# Altium PCB PCB_75_50.PcbDoc
Units mil, origin at the board's own origin, x right, y up, seen from the top; angles counter-clockwise.
Board outline 2583.93 x 856.85 mil, 2 copper layers (Top Layer, Bottom Layer), stack 33.8 mil thick; 13 components, 18 nets, 33 pads, 0 vias.
Unrouted connection lines stored in the file: 23.
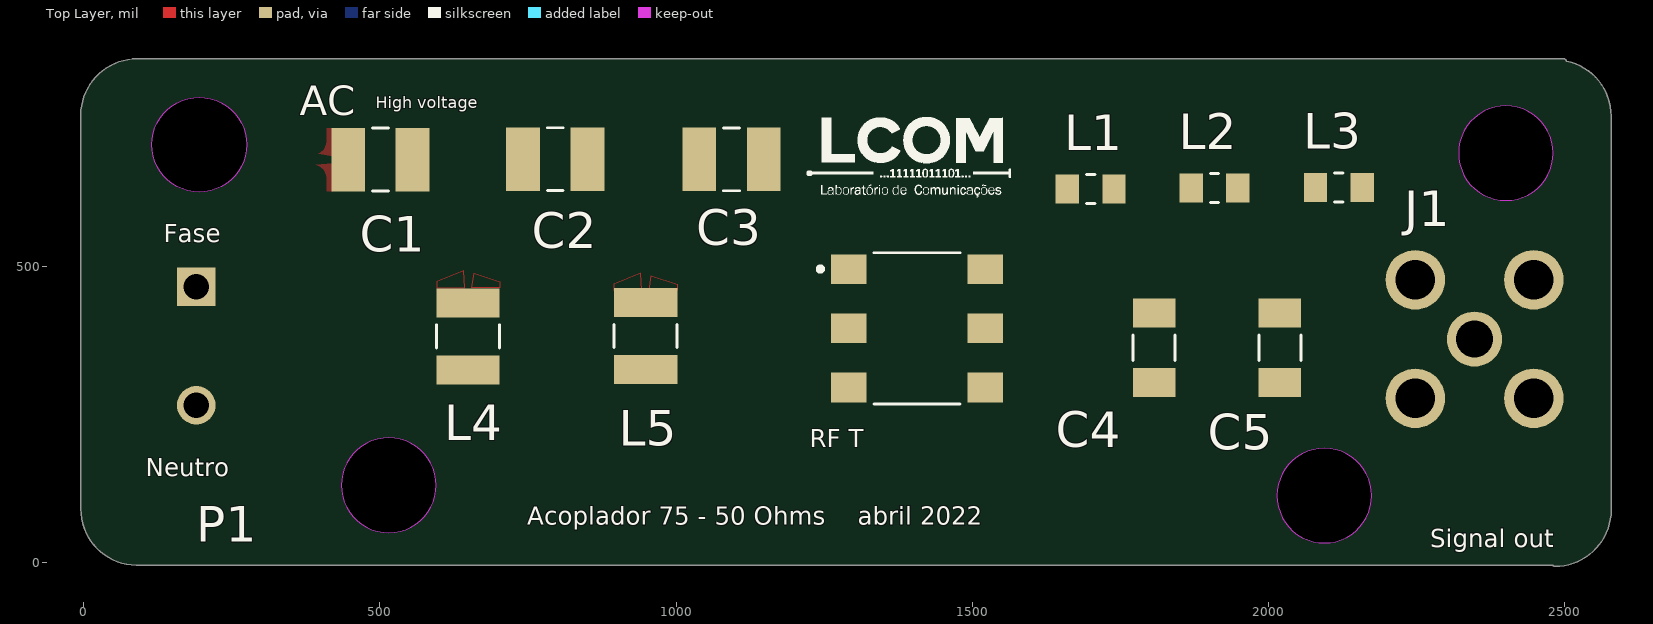
[diagram p0: Top Layer view]
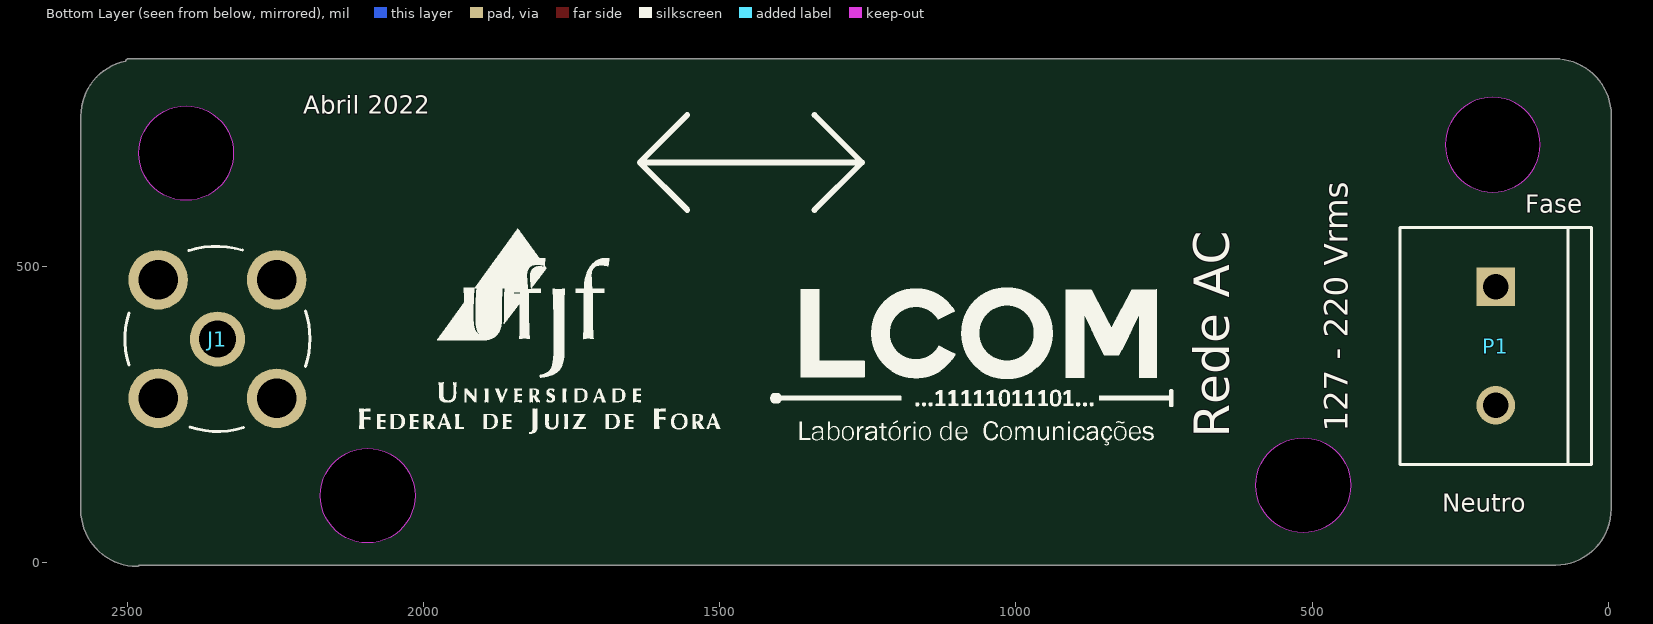
[diagram p1: Bottom Layer view, seen from below]

## Layer stack, top to bottom
Top Solder: solder mask 0.4, Solder Resist, Dk 3.5
Top Layer: signal copper 1.4
Dielectric 1: dielectric 31, FR-4, Dk 4.8
Bottom Layer: signal copper 1.4
Bottom Solder: solder mask 0.4, Solder Resist, Dk 3.5

## Board outline
-5.01,90 ccw(c90,90) 88.58,-5 ccw(c89.3,-0.05) 89.3,-5.06 2480.07,-5.06 ccw(c2483.9,-1.82) 2483.9,-6.83 ccw(c2483.9,88.18) 2578.91,88.18 2578.91,753.18 ccw(c2483.9,753.18) 2503.34,846.19 ccw(c2498.46,845.01) 2498.46,850.02 90.61,850.02 ccw(c90.61,845.01) 90.25,850.01 ccw(c90,844.93) 90,850.02 ccw(c90,755) -5.01,755
cut-out: 195,625 cw(c195,705) 115,705 cw(c195,705) 195,785 cw(c195,705) 275,705 cw(c195,705)
cut-out: 435,130 ccw(c515,130) 515,50 ccw(c515,130) 595,130 ccw(c515,130) 515,210 ccw(c515,130)
cut-out: 2014.6,112.59 ccw(c2094.6,112.59) 2094.6,32.59 ccw(c2094.6,112.59) 2174.6,112.59 ccw(c2094.6,112.59) 2094.6,192.59 ccw(c2094.6,112.59)
cut-out: 2321.2,690.83 ccw(c2401.2,690.83) 2401.2,610.83 ccw(c2401.2,690.83) 2481.2,690.83 ccw(c2401.2,690.83) 2401.2,770.83 ccw(c2401.2,690.83)

## Design rules (kind name [scope] priority, off if disabled: settings)
Clearance [All] p1: gap=10 ignorepadtopadclearanceinfootprint=FALSE except(0: Arc-Hole Track-Hole SMDPad-Hole THPad-Hole Via-Hole Fill-Hole Poly-Hole Region-Hole Text-Hole)
PolygonConnect [All] p1: connectstyle=Relief reliefconductorwidth=10 reliefentries=4 polygonreliefangle="90 Angle" airgapwidth=10
RoutingVias [All] p1: holewidth=28 width=50 viastyle="Through Hole" minholewidth=28 minwidth=50 maxholewidth=28 maxwidth=50
SolderMaskExpansion [All] p1: expansion=4 istentingtop=FALSE
Width imp_75 [InNetClass('imp_75')] p1: maxlimit=28 minlimit=23 preferedwidth=25.3 impedanceprofiledriven=TRUE impedanceprofileid={7B7016B5-FD99-4E57-9771-6602E8CCD9C1} impedanceprofilevalue=75.000000 minimp=50.000000 maximp=50.000000 favimp=50.000000
Width imp_50 [All] p2: maxlimit=56 minlimit=50 preferedwidth=53.66 impedanceprofiledriven=TRUE impedanceprofileid={B631ACBE-834E-4386-80CB-AED6A723D8CF} impedanceprofilevalue=50.000000 minimp=50.000000 maximp=50.000000 favimp=50.000000
30 further rules are at their usual default settings.

## Classes and differential pairs
net class imp_75: GND_quente NetC1_1 NetC1_2 NetC2_2 NetC3_2

## Components (designator, comment, footprint, x,y, rotation, side; value= is the part's Value field where it differs from the comment)
C1 "cap_1210 1.3nF" CAPC3225X200N 500.88,679.66 r0 top
C2 "cap_1210 620 pF" CAPC3225X200N 796.01,680.43 r0 top
C3 "cap_1210 1.3nF" CAPC3225X200N 1093.68,680.41 r0 top
C4 "cap1206 82pF" CAPC3216X160N 1807.24,362.2 r270 top
C5 "cap1206 82pF" CAPC3216X160N 2019.36,362.19 r270 top
J1 "SMA" JOHNSON_142-0701-201 2348.18,376.82 r180 bottom
L1 "ind_0805 180nH" IND_ASMCI-0805-4R7M-T 1700.04,630.27 r0 top
L2 "ind_0805 330nH" IND_ASMCI-0805-4R7M-T 1909.09,632 r0 top
L3 "ind_0805 180nH" IND_ASMCI-0805-4R7M-T 2118.97,632.8 r0 top
L4 "ind_1210 4.7 uH" INDC3225X120N 648.71,381.32 r90 top
L5 "ind_1210 4.7 uH" INDC3225X120N 948.6,382.09 r90 top
P1 "KRE_2_way" TE_282837-2 190,365 r270 bottom
"RF T" "RF_Transformer" FIL_KA4909-AL 1406.58,395.03 r0 top (schematic designator FL1)

## Footprints (in the part's own frame and the unit in brackets; to place one, negate y for a bottom-side part, rotate by r counter-clockwise, add the part's x,y. Pads: shape width x height; smd on the part's side, far side on the other; paste and mask are expansions set on the pad)
CAPC3216X160N [mm]
  rect 1.24x1.82 smd: 1(-1.485,0) 2(1.485,0)
  silkscreen extent -0.54,-0.9 0.54,0.9, body extent -1.6,-0.8 1.6,0.8, height 1.6
CAPC3225X200N [mm]
  rect 1.45x2.72 smd: 1(-1.382,0) 2(1.382,0)
  silkscreen extent -0.34,-1.35 0.34,1.35, body extent -1.6,-1.25 1.6,1.25, height 2
FIL_KA4909-AL [mm]
  rect 1.52x1.27 smd: 1(-2.925,2.54) 2(-2.925,0) 3(-2.925,-2.54) 4(2.925,-2.54) 5(2.925,0) 6(2.925,2.54)
  silkscreen extent -4.23,-3.24 1.85,3.24, body extent -3.59,-3.25 3.59,3.25, height 4.65
IND_ASMCI-0805-4R7M-T [mm]
  rect 1x1.25 smd: 1(-1,0) 2(1,0)
  silkscreen extent -0.18,-0.62 0.18,0.62, body extent -1,-0.63 1,0.63, height 1.26
INDC3225X120N [mm]
  rect 1.24x2.72 smd: 1(-1.44,0) 2(1.44,0)
  silkscreen extent -0.5,-1.35 0.5,1.35, body extent -1.6,-1.25 1.6,1.25, height 1.2
JOHNSON_142-0701-201 [mil]
  round 93 hole 62: 1(0,0)
  round 100.5 hole 67: 2(-100,100) 3(100,100) 4(100,-100) 5(-100,-100)
  silkscreen extent -156,-156 156,156, body extent -156,-156 156,156, height 380
TE_282837-2 [mm]
  rect 1.65x1.65 hole 1.1: 1(-2.54,0)
  round 1.65 hole 1.1: 2(2.54,0)
  silkscreen extent -5.08,-4.1 5.08,4.1, body extent -4.95,-4.14 5.81,4.06, height 10.3

## Part data
C1 C2 C3: library part cap_1210, "CAPACITOR, X7T, 33NF; Capacitance:33000pF; Capacitance Tolerance:Â± 10%; Dielectric Characteristic:X7T; Voltage Rating:630V; Capacitor Case Style:1210 [3225 Metric]; Operating Temperature Min:-55Â°C; Operating Temperature Max:125Â°C; Packaging:Cut Tape; SVHC:No SVHC (19-Dec-2012); Capacitor Terminals:SMD; Operating Temperature Range:-55Â°C to +125Â°C", Package=None, Availability=Unavailable, MF="{'manufacturer': u'Murata Electronics'}", MP=GR332DD72J333KW01L, Price=None
C4 C5: library part cap1206, Package=None, Availability=Unavailable, MF="{'manufacturer': u'Syfer'}", MP=1206J2K00820JCT, Price=None
J1: "Johnson Components 142-0701-201 / Conn Recept Straight Pcb .155\"\"", Package=None, Availability=Unavailable, MF="{'manufacturer': u'Cinch Connectivity Solutions Johnson'}", MP=142-0701-201, Price=None
L1 L2 L3: library part ind_0805, Package=None, Availability=Unavailable, MF="{'manufacturer': u'Abracon'}", MP=ASMCI-0805-4R7M-T, Price=None
L4 L5: library part ind_1210, "Ind Metal Alloy Shielded 1.5uH 20% 1MHz Powdered Iron 2.6A 1210 T/R", Package=None, Availability=Unavailable, MF="{'manufacturer': u'Murata Electronics'}", MP=1277AS-H-1R5M=P2, Price=None
P1: "TERM BLOCK 5.08MM 2POS SIDE ENTY", Package=None, Availability=Unavailable, MF="{'manufacturer': u'TE Connectivity'}", MP=282837-2, Price=None
"RF T": "Bias Injection Choke PWB 1.5 AL 30k 300M 1:1.5", Package=None, Availability=Unavailable, MF="{'manufacturer': u'Coilcraft'}", MP=KA4909-AL, Price=None

## Nets (pads, with @x,y where several pads share a name; then routed paths per layer and width w, separated by ;. In a path a pad name is that pad's centre, name@x,y a point inside that pad or via, vN(x,y) a via of type N, cw(c..) or ccw(c..) an arc to the next point about the centre after c; other vN are vias at no path point)
GND: "RF T.4" "RF T.5" C4.2 C5.2 J1.2 J1.3 J1.4 J1.5
GND_quente: "RF T.2" "RF T.3" L4.1 L5.1 P1.2
NetC1_1: C1.1 P1.1
NetC1_2: C1.2 C2.1 L4.2
NetC2_2: C2.2 C3.1 L5.2
NetC3_2: "RF T.1" C3.2
NetC4_1: C4.1 L1.2 L2.1
NetC5_1: C5.1 L2.2 L3.1
NetC6_1: 
NetC6_2: 
NetC7_2: 
NetC8_2: 
NetC9_1: 
NetC10_1: 
NetFL1_6: "RF T.6" L1.1
NetFL2_6: 
NetJ1_1: J1.1 L3.2
NetJ2_1: 

## Polygon pours and split planes (outlines as drawn)
NetC1_2 on Top Layer "NONET_L-01_P-001" (solid, pour order 5): 659.04,488.27 702.63,473.64 702.63,463.55 655.38,463.55
NetC1_2 on Top Layer "NONET_L-01_P-001" (solid, pour order 6): 641.16,492.28 595.65,473.71 595.65,463.62 642.9,463.62
NetC1_1 on Top Layer "NONET_L-01_P-001" (solid, pour order 10): 391.72,671.54 410.28,626.03 420.38,626.03 420.38,673.28
NetC1_1 on Top Layer "NONET_L-01_P-001" (solid, pour order 9): 395.73,689.42 410.35,733.01 420.45,733.01 420.45,685.76
NetC2_2 on Top Layer "NONET_L-01_P-001" (solid, pour order 8): 940.55,488.05 895.05,469.48 895.05,459.38 942.3,459.38
NetC2_2 on Top Layer "NONET_L-01_P-001" (solid, pour order 7): 958.44,484.03 1002.03,469.41 1002.03,459.32 954.78,459.32

## Other copper
Top Layer:
  pour cut-out: 641.7,496.63 cw(c615.48,499.92) 618.92,473.71 595.65,473.71
  pour cut-out: 656.58,496.56 ccw(c682.8,499.85) 679.36,473.64 702.63,473.64
  pour cut-out: 387.43,686.96 ccw(c384.15,713.18) 410.35,709.74 410.35,733.01
  pour cut-out: 387.37,672.08 cw(c384.08,645.86) 410.28,649.3 410.28,626.03
  pour cut-out: 955.97,492.33 ccw(c982.2,495.62) 978.76,469.41 1002.03,469.41
  pour cut-out: 941.1,492.4 cw(c914.87,495.69) 918.32,469.48 895.05,469.48
Multi-Layer:
  pour cut-out: 2018.54,112.59 ccw(c2098.54,112.59) 2098.54,32.59 ccw(c2098.54,112.59) 2178.54,112.59 ccw(c2098.54,112.59) 2098.54,192.59 ccw(c2098.54,112.59)
  pour cut-out: 435,130 ccw(c515,130) 515,50 ccw(c515,130) 595,130 ccw(c515,130) 515,210 ccw(c515,130)

## Silkscreen, mask and mechanical layers (free items; w line width, h text height)
Top Overlay:
  drawing of 58 lines, arcs and shapes, not listed
  text "High voltage" at 493.37,766.66 h20
  text "AC" at 365,755 h50
  text "Fase" at 135,540 h30
  text "Neutro" at 105,145 h30
  text "Acoplador 75 - 50 Ohms    abril 2022" at 748.76,63.04 h30
  text "Signal out" at 2273.41,25.66 h30
Bottom Overlay:
  drawing of 105 lines, arcs and shapes, not listed
  text "Abril 2022" at 2203,757 h30
  text "Fase" at 140,590 h30
  text "127 - 220 Vrms" at 440,220 h40 r270
  text "Rede AC" at 640,210 h60 r270
  text "Neutro" at 280,85 h30
Mechanical 13:
  circle w10: c195,705 r80
  circle w10: c2099.79,112.59 r80
  circle w10: c515,130 r80
  circle w10: c2401.2,690.83 r80
  lines w10: 89.3,-0.04 2480.77,-0.04 ; 90,0 cw(c90,90) 0,90 0,755 cw(c90,755) 90,845 ; 90.61,845.01 2498.46,845.01 ; 2483.9,-1.82 ccw(c2483.9,88.18) 2573.9,88.18 2573.9,753.18 ccw(c2483.9,753.18) 2483.9,843.18